# Altium PCB AVR精简学习板.PcbDoc (part 3 of 10)
Units mm, origin at the board's own origin, x right, y up, seen from the top; angles counter-clockwise.
Board outline 152.4 x 101.6 mm, 2 copper layers (Top Layer, Bottom Layer); 44 components, 51 nets, 211 pads, 6 vias.
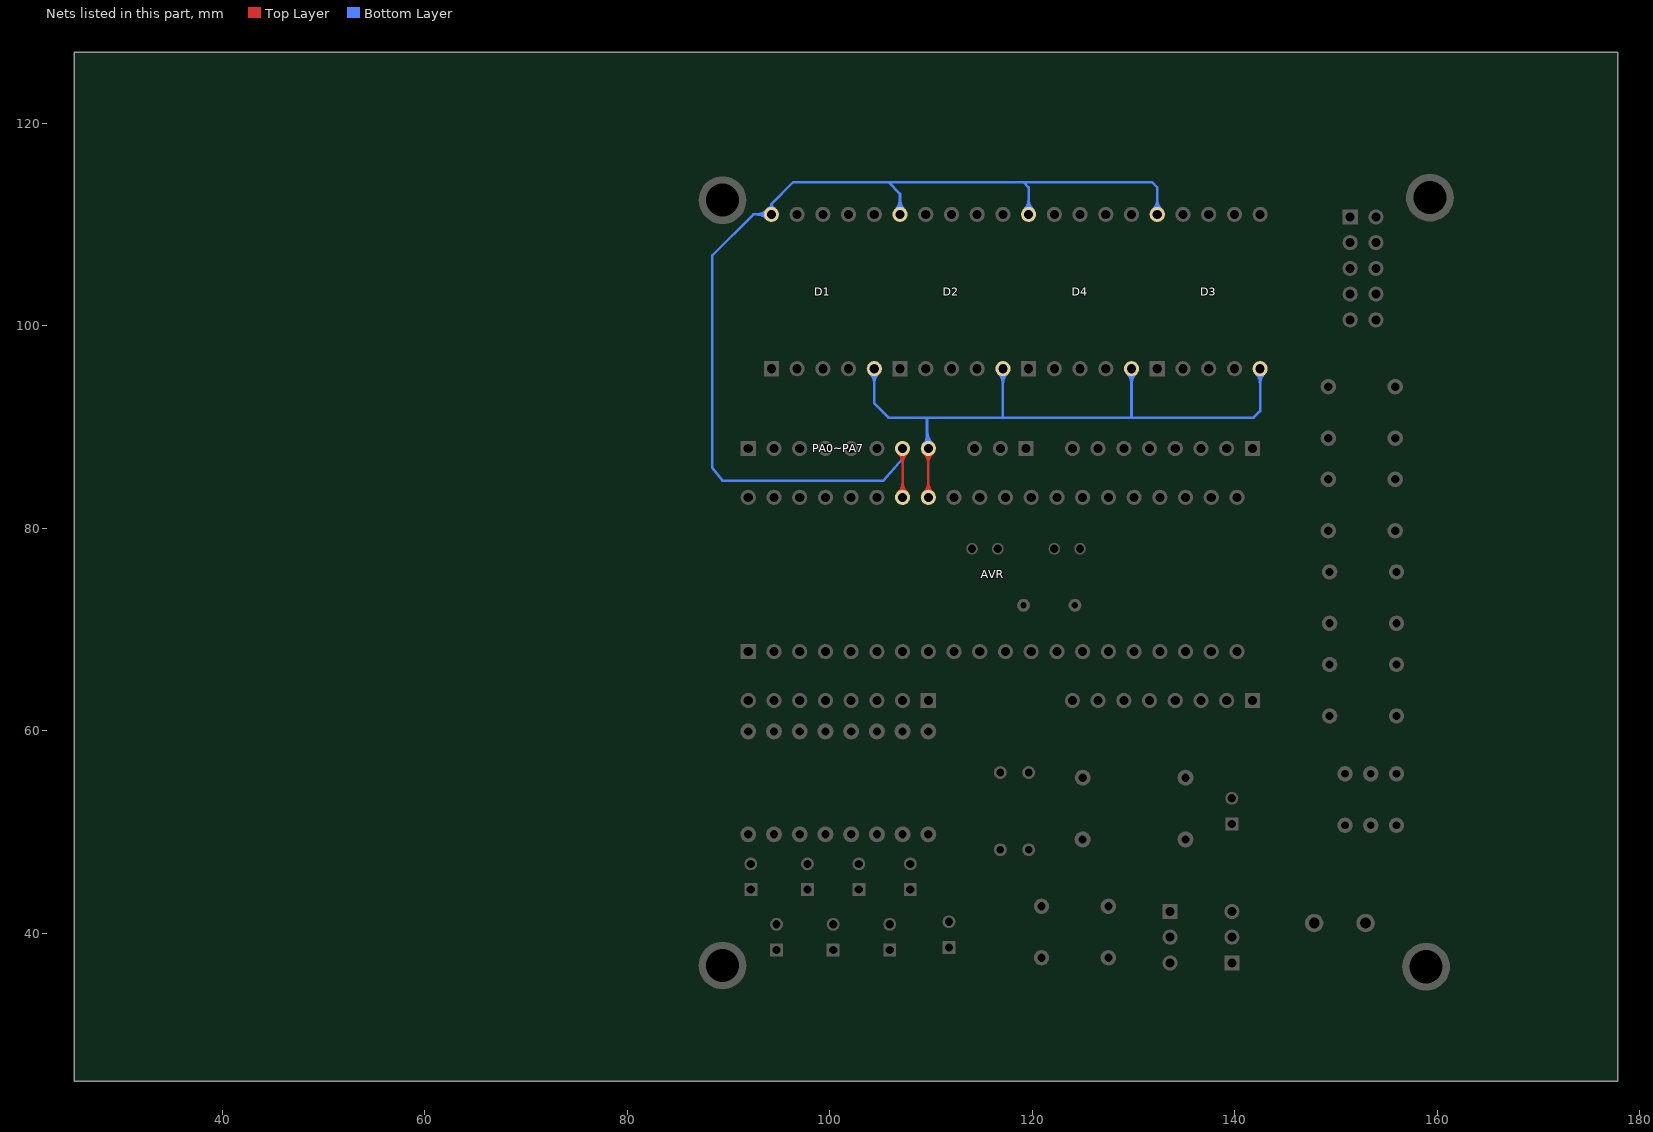
[diagram p3: the nets of this part, all layers, seen from the top]

## Via types
v1: diameter 1.27, hole 0.711, Top Layer to Bottom Layer, 6 vias

## Nets (pads, with @x,y where several pads share a name; then routed paths per layer and width w, separated by ;. In a path a pad name is that pad's centre, name@x,y a point inside that pad or via, vN(x,y) a via of type N, cw(c..) or ccw(c..) an arc to the next point about the centre after c; other vN are vias at no path point) (continued)
D6: AVR.34 D1.10 D2.10 D3.10 D4.10 PA0~PA7.7 | length 278.7
  Top Layer w0.254: D1.10@94.234,110.998 D1.10@94.234,111.125 ; AVR.34@107.188,83.058 PA0~PA7.7@107.188,87.884 ; AVR.34@106.747,83.499 ccw(c105.684,84.562) 107.188,84.562 ; AVR.34@106.747,83.499 ccw(c105.684,84.562) 107.188,84.562 ; AVR.34@106.747,83.499 ccw(c105.684,84.562) 107.188,84.562 ; AVR.34@106.747,83.499 ccw(c105.684,84.562) 107.188,84.562 ; AVR.34@106.747,83.499 ccw(c105.684,84.562) 107.188,84.562 ; AVR.34@106.747,83.499 ccw(c105.684,84.562) 107.188,84.562 ; AVR.34@106.747,83.499 ccw(c105.684,84.562) 107.188,84.562 ; PA0~PA7.7@106.747,87.443 cw(c105.684,86.38) 107.188,86.38 ; PA0~PA7.7@106.747,87.443 cw(c105.684,86.38) 107.188,86.38 ; PA0~PA7.7@106.747,87.443 cw(c105.684,86.38) 107.188,86.38 ; PA0~PA7.7@106.747,87.443 cw(c105.684,86.38) 107.188,86.38 ; PA0~PA7.7@106.747,87.443 cw(c105.684,86.38) 107.188,86.38 ; PA0~PA7.7@106.747,87.443 cw(c105.684,86.38) 107.188,86.38 ; PA0~PA7.7@106.747,87.443 cw(c105.684,86.38) 107.188,86.38 ; AVR.34@106.927,83.319 ccw(c106.297,83.949) 107.188,83.949 ; AVR.34@106.927,83.319 ccw(c106.297,83.949) 107.188,83.949 ; AVR.34@106.927,83.319 ccw(c106.297,83.949) 107.188,83.949 ; AVR.34@106.927,83.319 ccw(c106.297,83.949) 107.188,83.949 ; AVR.34@106.927,83.319 ccw(c106.297,83.949) 107.188,83.949 ; AVR.34@106.927,83.319 ccw(c106.297,83.949) 107.188,83.949 ; AVR.34@106.927,83.319 ccw(c106.297,83.949) 107.188,83.949 ; PA0~PA7.7@106.927,87.623 cw(c106.297,86.993) 107.188,86.993 ; PA0~PA7.7@106.927,87.623 cw(c106.297,86.993) 107.188,86.993 ; PA0~PA7.7@106.927,87.623 cw(c106.297,86.993) 107.188,86.993 ; PA0~PA7.7@106.927,87.623 cw(c106.297,86.993) 107.188,86.993 ; PA0~PA7.7@106.927,87.623 cw(c106.297,86.993) 107.188,86.993 ; PA0~PA7.7@106.927,87.623 cw(c106.297,86.993) 107.188,86.993 ; PA0~PA7.7@106.927,87.623 cw(c106.297,86.993) 107.188,86.993 ; 107.188,83.949 ccw(c108.079,83.949) AVR.34@107.449,83.319 ; 107.188,83.949 ccw(c108.079,83.949) AVR.34@107.449,83.319 ; 107.188,83.949 ccw(c108.079,83.949) AVR.34@107.449,83.319 ; 107.188,83.949 ccw(c108.079,83.949) AVR.34@107.449,83.319 ; 107.188,83.949 ccw(c108.079,83.949) AVR.34@107.449,83.319 ; 107.188,83.949 ccw(c108.079,83.949) AVR.34@107.449,83.319 ; 107.188,83.949 ccw(c108.079,83.949) AVR.34@107.449,83.319 ; 107.188,84.562 ccw(c108.692,84.562) AVR.34@107.629,83.499 ; 107.188,84.562 ccw(c108.692,84.562) AVR.34@107.629,83.499 ; 107.188,84.562 ccw(c108.692,84.562) AVR.34@107.629,83.499 ; 107.188,84.562 ccw(c108.692,84.562) AVR.34@107.629,83.499 ; 107.188,84.562 ccw(c108.692,84.562) AVR.34@107.629,83.499 ; 107.188,84.562 ccw(c108.692,84.562) AVR.34@107.629,83.499 ; 107.188,84.562 ccw(c108.692,84.562) AVR.34@107.629,83.499 ; 107.188,86.38 cw(c108.692,86.38) PA0~PA7.7@107.629,87.443 ; 107.188,86.38 cw(c108.692,86.38) PA0~PA7.7@107.629,87.443 ; 107.188,86.38 cw(c108.692,86.38) PA0~PA7.7@107.629,87.443 ; 107.188,86.38 cw(c108.692,86.38) PA0~PA7.7@107.629,87.443 ; 107.188,86.38 cw(c108.692,86.38) PA0~PA7.7@107.629,87.443 ; 107.188,86.38 cw(c108.692,86.38) PA0~PA7.7@107.629,87.443 ; 107.188,86.38 cw(c108.692,86.38) PA0~PA7.7@107.629,87.443 ; 107.188,86.993 cw(c108.079,86.993) PA0~PA7.7@107.449,87.623 ; 107.188,86.993 cw(c108.079,86.993) PA0~PA7.7@107.449,87.623 ; 107.188,86.993 cw(c108.079,86.993) PA0~PA7.7@107.449,87.623 ; 107.188,86.993 cw(c108.079,86.993) PA0~PA7.7@107.449,87.623 ; 107.188,86.993 cw(c108.079,86.993) PA0~PA7.7@107.449,87.623 ; 107.188,86.993 cw(c108.079,86.993) PA0~PA7.7@107.449,87.623 ; 107.188,86.993 cw(c108.079,86.993) PA0~PA7.7@107.449,87.623
  Bottom Layer w0.254: 105.791,114.173 106.934,113.03 D2.10@106.934,110.998 ; PA0~PA7.7@107.188,87.884 107.188,86.868 ; 119.126,114.173 119.634,113.665 D4.10@119.634,110.998 ; D3.10@132.334,110.998 132.334,113.665 131.826,114.173 96.393,114.173 94.234,112.014 ; 92.73,110.998 cw(c92.73,109.494) D1.10@93.793,110.557 ; 92.73,110.998 ccw(c92.73,112.502) D1.10@93.793,111.439 ; 92.73,110.998 cw(c92.73,109.494) D1.10@93.793,110.557 ; 92.73,110.998 ccw(c92.73,112.502) D1.10@93.793,111.439 ; 92.73,110.998 ccw(c92.73,112.502) D1.10@93.793,111.439 ; 92.73,110.998 cw(c92.73,109.494) D1.10@93.793,110.557 ; 92.73,110.998 ccw(c92.73,112.502) D1.10@93.793,111.439 ; 92.73,110.998 cw(c92.73,109.494) D1.10@93.793,110.557 ; 92.73,110.998 ccw(c92.73,112.502) D1.10@93.793,111.439 ; 92.73,110.998 cw(c92.73,109.494) D1.10@93.793,110.557 ; 92.73,110.998 ccw(c92.73,112.502) D1.10@93.793,111.439 ; 92.73,110.998 cw(c92.73,109.494) D1.10@93.793,110.557 ; 92.73,110.998 ccw(c92.73,112.502) D1.10@93.793,111.439 ; 92.73,110.998 cw(c92.73,109.494) D1.10@93.793,110.557 ; 93.343,110.998 cw(c93.343,110.107) D1.10@93.973,110.737 ; 93.343,110.998 ccw(c93.343,111.889) D1.10@93.973,111.259 ; 93.343,110.998 cw(c93.343,110.107) D1.10@93.973,110.737 ; 93.343,110.998 ccw(c93.343,111.889) D1.10@93.973,111.259 ; 93.343,110.998 ccw(c93.343,111.889) D1.10@93.973,111.259 ; 93.343,110.998 cw(c93.343,110.107) D1.10@93.973,110.737 ; 93.343,110.998 ccw(c93.343,111.889) D1.10@93.973,111.259 ; 93.343,110.998 cw(c93.343,110.107) D1.10@93.973,110.737 ; 93.343,110.998 ccw(c93.343,111.889) D1.10@93.973,111.259 ; 93.343,110.998 cw(c93.343,110.107) D1.10@93.973,110.737 ; 93.343,110.998 ccw(c93.343,111.889) D1.10@93.973,111.259 ; 93.343,110.998 cw(c93.343,110.107) D1.10@93.973,110.737 ; 93.343,110.998 ccw(c93.343,111.889) D1.10@93.973,111.259 ; 93.343,110.998 cw(c93.343,110.107) D1.10@93.973,110.737 ; D1.10@93.951,111.553 ccw(c93.717,112.014) 94.234,112.014 ; D1.10@93.951,111.553 ccw(c93.717,112.014) 94.234,112.014 ; D1.10@93.951,111.553 ccw(c93.717,112.014) 94.234,112.014 ; D1.10@93.951,111.553 ccw(c93.717,112.014) 94.234,112.014 ; D1.10@93.951,111.553 ccw(c93.717,112.014) 94.234,112.014 ; D1.10@93.951,111.553 ccw(c93.717,112.014) 94.234,112.014 ; D1.10@93.951,111.553 ccw(c93.717,112.014) 94.234,112.014 ; 94.234,112.014 ccw(c94.751,112.014) D1.10@94.517,111.553 ; 94.234,112.014 ccw(c94.751,112.014) D1.10@94.517,111.553 ; 94.234,112.014 ccw(c94.751,112.014) D1.10@94.517,111.553 ; 94.234,112.014 ccw(c94.751,112.014) D1.10@94.517,111.553 ; 94.234,112.014 ccw(c94.751,112.014) D1.10@94.517,111.553 ; 94.234,112.014 ccw(c94.751,112.014) D1.10@94.517,111.553 ; 94.234,112.014 ccw(c94.751,112.014) D1.10@94.517,111.553 ; 94.234,112.014 D1.10@94.234,110.998 92.456,110.998 88.392,106.934 88.392,85.979 89.408,84.709 105.283,84.709 107.188,86.868 ; D2.10@106.493,111.439 ccw(c105.43,112.502) 106.934,112.502 ; D2.10@106.493,111.439 ccw(c105.43,112.502) 106.934,112.502 ; D2.10@106.493,111.439 ccw(c105.43,112.502) 106.934,112.502 ; D2.10@106.493,111.439 ccw(c105.43,112.502) 106.934,112.502 ; D2.10@106.493,111.439 ccw(c105.43,112.502) 106.934,112.502 ; D2.10@106.493,111.439 ccw(c105.43,112.502) 106.934,112.502 ; D2.10@106.493,111.439 ccw(c105.43,112.502) 106.934,112.502 ; D2.10@106.673,111.259 ccw(c106.043,111.889) 106.934,111.889 ; D2.10@106.673,111.259 ccw(c106.043,111.889) 106.934,111.889 ; D2.10@106.673,111.259 ccw(c106.043,111.889) 106.934,111.889 ; D2.10@106.673,111.259 ccw(c106.043,111.889) 106.934,111.889 ; D2.10@106.673,111.259 ccw(c106.043,111.889) 106.934,111.889 ; D2.10@106.673,111.259 ccw(c106.043,111.889) 106.934,111.889 ; D2.10@106.673,111.259 ccw(c106.043,111.889) 106.934,111.889 ; PA0~PA7.7@106.905,87.329 cw(c106.671,86.868) 107.188,86.868 ; PA0~PA7.7@106.905,87.329 cw(c106.671,86.868) 107.188,86.868 ; PA0~PA7.7@106.905,87.329 cw(c106.671,86.868) 107.188,86.868 ; PA0~PA7.7@106.905,87.329 cw(c106.671,86.868) 107.188,86.868 ; PA0~PA7.7@106.905,87.329 cw(c106.671,86.868) 107.188,86.868 ; PA0~PA7.7@106.905,87.329 cw(c106.671,86.868) 107.188,86.868 ; PA0~PA7.7@106.905,87.329 cw(c106.671,86.868) 107.188,86.868 ; 106.934,111.889 ccw(c107.825,111.889) D2.10@107.195,111.259 ; 106.934,111.889 ccw(c107.825,111.889) D2.10@107.195,111.259 ; 106.934,111.889 ccw(c107.825,111.889) D2.10@107.195,111.259 ; 106.934,111.889 ccw(c107.825,111.889) D2.10@107.195,111.259 ; 106.934,111.889 ccw(c107.825,111.889) D2.10@107.195,111.259 ; 106.934,111.889 ccw(c107.825,111.889) D2.10@107.195,111.259 ; 106.934,111.889 ccw(c107.825,111.889) D2.10@107.195,111.259 ; 106.934,112.502 ccw(c108.438,112.502) D2.10@107.375,111.439 ; 106.934,112.502 ccw(c108.438,112.502) D2.10@107.375,111.439 ; 106.934,112.502 ccw(c108.438,112.502) D2.10@107.375,111.439 ; 106.934,112.502 ccw(c108.438,112.502) D2.10@107.375,111.439 ; 106.934,112.502 ccw(c108.438,112.502) D2.10@107.375,111.439 ; 106.934,112.502 ccw(c108.438,112.502) D2.10@107.375,111.439 ; 106.934,112.502 ccw(c108.438,112.502) D2.10@107.375,111.439 ; 107.188,86.868 cw(c107.705,86.868) PA0~PA7.7@107.471,87.329 ; 107.188,86.868 cw(c107.705,86.868) PA0~PA7.7@107.471,87.329 ; 107.188,86.868 cw(c107.705,86.868) PA0~PA7.7@107.471,87.329 ; 107.188,86.868 cw(c107.705,86.868) PA0~PA7.7@107.471,87.329 ; 107.188,86.868 cw(c107.705,86.868) PA0~PA7.7@107.471,87.329 ; 107.188,86.868 cw(c107.705,86.868) PA0~PA7.7@107.471,87.329 ; 107.188,86.868 cw(c107.705,86.868) PA0~PA7.7@107.471,87.329 ; D4.10@119.193,111.439 ccw(c118.13,112.502) 119.634,112.502 ; D4.10@119.193,111.439 ccw(c118.13,112.502) 119.634,112.502 ; D4.10@119.193,111.439 ccw(c118.13,112.502) 119.634,112.502 ; D4.10@119.193,111.439 ccw(c118.13,112.502) 119.634,112.502 ; D4.10@119.193,111.439 ccw(c118.13,112.502) 119.634,112.502 ; D4.10@119.193,111.439 ccw(c118.13,112.502) 119.634,112.502 ; D4.10@119.193,111.439 ccw(c118.13,112.502) 119.634,112.502 ; D4.10@119.373,111.259 ccw(c118.743,111.889) 119.634,111.889 ; D4.10@119.373,111.259 ccw(c118.743,111.889) 119.634,111.889 ; D4.10@119.373,111.259 ccw(c118.743,111.889) 119.634,111.889 ; D4.10@119.373,111.259 ccw(c118.743,111.889) 119.634,111.889 ; D4.10@119.373,111.259 ccw(c118.743,111.889) 119.634,111.889 ; D4.10@119.373,111.259 ccw(c118.743,111.889) 119.634,111.889 ; D4.10@119.373,111.259 ccw(c118.743,111.889) 119.634,111.889 ; 119.634,111.889 ccw(c120.525,111.889) D4.10@119.895,111.259 ; 119.634,111.889 ccw(c120.525,111.889) D4.10@119.895,111.259 ; 119.634,111.889 ccw(c120.525,111.889) D4.10@119.895,111.259 ; 119.634,111.889 ccw(c120.525,111.889) D4.10@119.895,111.259 ; 119.634,111.889 ccw(c120.525,111.889) D4.10@119.895,111.259 ; 119.634,111.889 ccw(c120.525,111.889) D4.10@119.895,111.259 ; 119.634,111.889 ccw(c120.525,111.889) D4.10@119.895,111.259 ; 119.634,112.502 ccw(c121.138,112.502) D4.10@120.075,111.439 ; 119.634,112.502 ccw(c121.138,112.502) D4.10@120.075,111.439 ; 119.634,112.502 ccw(c121.138,112.502) D4.10@120.075,111.439 ; 119.634,112.502 ccw(c121.138,112.502) D4.10@120.075,111.439 ; 119.634,112.502 ccw(c121.138,112.502) D4.10@120.075,111.439 ; 119.634,112.502 ccw(c121.138,112.502) D4.10@120.075,111.439 ; 119.634,112.502 ccw(c121.138,112.502) D4.10@120.075,111.439 ; D3.10@131.893,111.439 ccw(c130.83,112.502) 132.334,112.502 ; D3.10@131.893,111.439 ccw(c130.83,112.502) 132.334,112.502 ; D3.10@131.893,111.439 ccw(c130.83,112.502) 132.334,112.502 ; D3.10@131.893,111.439 ccw(c130.83,112.502) 132.334,112.502 ; D3.10@131.893,111.439 ccw(c130.83,112.502) 132.334,112.502 ; D3.10@131.893,111.439 ccw(c130.83,112.502) 132.334,112.502 ; D3.10@131.893,111.439 ccw(c130.83,112.502) 132.334,112.502 ; D3.10@132.073,111.259 ccw(c131.443,111.889) 132.334,111.889 ; D3.10@132.073,111.259 ccw(c131.443,111.889) 132.334,111.889 ; D3.10@132.073,111.259 ccw(c131.443,111.889) 132.334,111.889 ; D3.10@132.073,111.259 ccw(c131.443,111.889) 132.334,111.889 ; D3.10@132.073,111.259 ccw(c131.443,111.889) 132.334,111.889 ; D3.10@132.073,111.259 ccw(c131.443,111.889) 132.334,111.889 ; D3.10@132.073,111.259 ccw(c131.443,111.889) 132.334,111.889 ; 132.334,111.889 ccw(c133.225,111.889) D3.10@132.595,111.259 ; 132.334,111.889 ccw(c133.225,111.889) D3.10@132.595,111.259 ; 132.334,111.889 ccw(c133.225,111.889) D3.10@132.595,111.259 ; 132.334,111.889 ccw(c133.225,111.889) D3.10@132.595,111.259 ; 132.334,111.889 ccw(c133.225,111.889) D3.10@132.595,111.259 ; 132.334,111.889 ccw(c133.225,111.889) D3.10@132.595,111.259 ; 132.334,111.889 ccw(c133.225,111.889) D3.10@132.595,111.259 ; 132.334,112.502 ccw(c133.838,112.502) D3.10@132.775,111.439 ; 132.334,112.502 ccw(c133.838,112.502) D3.10@132.775,111.439 ; 132.334,112.502 ccw(c133.838,112.502) D3.10@132.775,111.439 ; 132.334,112.502 ccw(c133.838,112.502) D3.10@132.775,111.439 ; 132.334,112.502 ccw(c133.838,112.502) D3.10@132.775,111.439 ; 132.334,112.502 ccw(c133.838,112.502) D3.10@132.775,111.439 ; 132.334,112.502 ccw(c133.838,112.502) D3.10@132.775,111.439
D7: AVR.33 D1.5 D2.5 D3.5 D4.5 PA0~PA7.8 | length 246
  Top Layer w0.254: AVR.33@109.728,83.058 PA0~PA7.8@109.728,87.884 ; AVR.33@109.287,83.499 ccw(c108.224,84.562) 109.728,84.562 ; AVR.33@109.287,83.499 ccw(c108.224,84.562) 109.728,84.562 ; AVR.33@109.287,83.499 ccw(c108.224,84.562) 109.728,84.562 ; AVR.33@109.287,83.499 ccw(c108.224,84.562) 109.728,84.562 ; AVR.33@109.287,83.499 ccw(c108.224,84.562) 109.728,84.562 ; AVR.33@109.287,83.499 ccw(c108.224,84.562) 109.728,84.562 ; AVR.33@109.287,83.499 ccw(c108.224,84.562) 109.728,84.562 ; PA0~PA7.8@109.287,87.443 cw(c108.224,86.38) 109.728,86.38 ; PA0~PA7.8@109.287,87.443 cw(c108.224,86.38) 109.728,86.38 ; PA0~PA7.8@109.287,87.443 cw(c108.224,86.38) 109.728,86.38 ; PA0~PA7.8@109.287,87.443 cw(c108.224,86.38) 109.728,86.38 ; PA0~PA7.8@109.287,87.443 cw(c108.224,86.38) 109.728,86.38 ; PA0~PA7.8@109.287,87.443 cw(c108.224,86.38) 109.728,86.38 ; PA0~PA7.8@109.287,87.443 cw(c108.224,86.38) 109.728,86.38 ; AVR.33@109.467,83.319 ccw(c108.837,83.949) 109.728,83.949 ; AVR.33@109.467,83.319 ccw(c108.837,83.949) 109.728,83.949 ; AVR.33@109.467,83.319 ccw(c108.837,83.949) 109.728,83.949 ; AVR.33@109.467,83.319 ccw(c108.837,83.949) 109.728,83.949 ; AVR.33@109.467,83.319 ccw(c108.837,83.949) 109.728,83.949 ; AVR.33@109.467,83.319 ccw(c108.837,83.949) 109.728,83.949 ; AVR.33@109.467,83.319 ccw(c108.837,83.949) 109.728,83.949 ; PA0~PA7.8@109.467,87.623 cw(c108.837,86.993) 109.728,86.993 ; PA0~PA7.8@109.467,87.623 cw(c108.837,86.993) 109.728,86.993 ; PA0~PA7.8@109.467,87.623 cw(c108.837,86.993) 109.728,86.993 ; PA0~PA7.8@109.467,87.623 cw(c108.837,86.993) 109.728,86.993 ; PA0~PA7.8@109.467,87.623 cw(c108.837,86.993) 109.728,86.993 ; PA0~PA7.8@109.467,87.623 cw(c108.837,86.993) 109.728,86.993 ; PA0~PA7.8@109.467,87.623 cw(c108.837,86.993) 109.728,86.993 ; 109.728,83.949 ccw(c110.619,83.949) AVR.33@109.989,83.319 ; 109.728,83.949 ccw(c110.619,83.949) AVR.33@109.989,83.319 ; 109.728,83.949 ccw(c110.619,83.949) AVR.33@109.989,83.319 ; 109.728,83.949 ccw(c110.619,83.949) AVR.33@109.989,83.319 ; 109.728,83.949 ccw(c110.619,83.949) AVR.33@109.989,83.319 ; 109.728,83.949 ccw(c110.619,83.949) AVR.33@109.989,83.319 ; 109.728,83.949 ccw(c110.619,83.949) AVR.33@109.989,83.319 ; 109.728,84.562 ccw(c111.232,84.562) AVR.33@110.169,83.499 ; 109.728,84.562 ccw(c111.232,84.562) AVR.33@110.169,83.499 ; 109.728,84.562 ccw(c111.232,84.562) AVR.33@110.169,83.499 ; 109.728,84.562 ccw(c111.232,84.562) AVR.33@110.169,83.499 ; 109.728,84.562 ccw(c111.232,84.562) AVR.33@110.169,83.499 ; 109.728,84.562 ccw(c111.232,84.562) AVR.33@110.169,83.499 ; 109.728,84.562 ccw(c111.232,84.562) AVR.33@110.169,83.499 ; 109.728,86.38 cw(c111.232,86.38) PA0~PA7.8@110.169,87.443 ; 109.728,86.38 cw(c111.232,86.38) PA0~PA7.8@110.169,87.443 ; 109.728,86.38 cw(c111.232,86.38) PA0~PA7.8@110.169,87.443 ; 109.728,86.38 cw(c111.232,86.38) PA0~PA7.8@110.169,87.443 ; 109.728,86.38 cw(c111.232,86.38) PA0~PA7.8@110.169,87.443 ; 109.728,86.38 cw(c111.232,86.38) PA0~PA7.8@110.169,87.443 ; 109.728,86.38 cw(c111.232,86.38) PA0~PA7.8@110.169,87.443 ; 109.728,86.993 cw(c110.619,86.993) PA0~PA7.8@109.989,87.623 ; 109.728,86.993 cw(c110.619,86.993) PA0~PA7.8@109.989,87.623 ; 109.728,86.993 cw(c110.619,86.993) PA0~PA7.8@109.989,87.623 ; 109.728,86.993 cw(c110.619,86.993) PA0~PA7.8@109.989,87.623 ; 109.728,86.993 cw(c110.619,86.993) PA0~PA7.8@109.989,87.623 ; 109.728,86.993 cw(c110.619,86.993) PA0~PA7.8@109.989,87.623 ; 109.728,86.993 cw(c110.619,86.993) PA0~PA7.8@109.989,87.623
  Bottom Layer w0.254: D1.5@104.394,95.758 104.394,92.329 105.791,90.932 141.859,90.932 142.494,91.567 D3.5@142.494,95.758 ; 109.601,90.932 109.601,88.011 PA0~PA7.8@109.728,87.884 ; 116.967,90.932 117.094,91.059 D2.5@117.094,95.758 ; 129.794,90.932 D4.5@129.794,95.758 ; D1.5@103.953,95.317 cw(c102.89,94.254) 104.394,94.254 ; D1.5@103.953,95.317 cw(c102.89,94.254) 104.394,94.254 ; D1.5@103.953,95.317 cw(c102.89,94.254) 104.394,94.254 ; D1.5@103.953,95.317 cw(c102.89,94.254) 104.394,94.254 ; D1.5@103.953,95.317 cw(c102.89,94.254) 104.394,94.254 ; D1.5@103.953,95.317 cw(c102.89,94.254) 104.394,94.254 ; D1.5@103.953,95.317 cw(c102.89,94.254) 104.394,94.254 ; D1.5@104.133,95.497 cw(c103.503,94.867) 104.394,94.867 ; D1.5@104.133,95.497 cw(c103.503,94.867) 104.394,94.867 ; D1.5@104.133,95.497 cw(c103.503,94.867) 104.394,94.867 ; D1.5@104.133,95.497 cw(c103.503,94.867) 104.394,94.867 ; D1.5@104.133,95.497 cw(c103.503,94.867) 104.394,94.867 ; D1.5@104.133,95.497 cw(c103.503,94.867) 104.394,94.867 ; D1.5@104.133,95.497 cw(c103.503,94.867) 104.394,94.867 ; 104.394,94.254 cw(c105.898,94.254) D1.5@104.835,95.317 ; 104.394,94.254 cw(c105.898,94.254) D1.5@104.835,95.317 ; 104.394,94.254 cw(c105.898,94.254) D1.5@104.835,95.317 ; 104.394,94.254 cw(c105.898,94.254) D1.5@104.835,95.317 ; 104.394,94.254 cw(c105.898,94.254) D1.5@104.835,95.317 ; 104.394,94.254 cw(c105.898,94.254) D1.5@104.835,95.317 ; 104.394,94.254 cw(c105.898,94.254) D1.5@104.835,95.317 ; 104.394,94.867 cw(c105.285,94.867) D1.5@104.655,95.497 ; 104.394,94.867 cw(c105.285,94.867) D1.5@104.655,95.497 ; 104.394,94.867 cw(c105.285,94.867) D1.5@104.655,95.497 ; 104.394,94.867 cw(c105.285,94.867) D1.5@104.655,95.497 ; 104.394,94.867 cw(c105.285,94.867) D1.5@104.655,95.497 ; 104.394,94.867 cw(c105.285,94.867) D1.5@104.655,95.497 ; 104.394,94.867 cw(c105.285,94.867) D1.5@104.655,95.497 ; PA0~PA7.8@109.287,88.325 ccw(c108.531,89.081) 109.601,89.081 ; PA0~PA7.8@109.287,88.325 ccw(c108.531,89.081) 109.601,89.081 ; PA0~PA7.8@109.287,88.325 ccw(c108.531,89.081) 109.601,89.081 ; PA0~PA7.8@109.287,88.325 ccw(c108.531,89.081) 109.601,89.081 ; PA0~PA7.8@109.287,88.325 ccw(c108.531,89.081) 109.601,89.081 ; PA0~PA7.8@109.287,88.325 ccw(c108.531,89.081) 109.601,89.081 ; PA0~PA7.8@109.287,88.325 ccw(c108.531,89.081) 109.601,89.081 ; 109.601,89.081 ccw(c110.925,89.081) PA0~PA7.8@109.989,88.145 ; 109.601,89.081 ccw(c110.925,89.081) PA0~PA7.8@109.989,88.145 ; 109.601,89.081 ccw(c110.925,89.081) PA0~PA7.8@109.989,88.145 ; 109.601,89.081 ccw(c110.925,89.081) PA0~PA7.8@109.989,88.145 ; 109.601,89.081 ccw(c110.925,89.081) PA0~PA7.8@109.989,88.145 ; 109.601,89.081 ccw(c110.925,89.081) PA0~PA7.8@109.989,88.145 ; 109.601,89.081 ccw(c110.925,89.081) PA0~PA7.8@109.989,88.145 ; 109.601,89.695 ccw(c111.539,89.695) PA0~PA7.8@110.169,88.325 ; 109.601,89.695 ccw(c111.539,89.695) PA0~PA7.8@110.169,88.325 ; 109.601,89.695 ccw(c111.539,89.695) PA0~PA7.8@110.169,88.325 ; 109.601,89.695 ccw(c111.539,89.695) PA0~PA7.8@110.169,88.325 ; 109.601,89.695 ccw(c111.539,89.695) PA0~PA7.8@110.169,88.325 ; 109.601,89.695 ccw(c111.539,89.695) PA0~PA7.8@110.169,88.325 ; 109.601,89.695 ccw(c111.539,89.695) PA0~PA7.8@110.169,88.325 ; D2.5@116.653,95.317 cw(c115.59,94.254) 117.094,94.254 ; D2.5@116.653,95.317 cw(c115.59,94.254) 117.094,94.254 ; D2.5@116.653,95.317 cw(c115.59,94.254) 117.094,94.254 ; D2.5@116.653,95.317 cw(c115.59,94.254) 117.094,94.254 ; D2.5@116.653,95.317 cw(c115.59,94.254) 117.094,94.254 ; D2.5@116.653,95.317 cw(c115.59,94.254) 117.094,94.254 ; D2.5@116.653,95.317 cw(c115.59,94.254) 117.094,94.254 ; D2.5@116.833,95.497 cw(c116.203,94.867) 117.094,94.867 ; D2.5@116.833,95.497 cw(c116.203,94.867) 117.094,94.867 ; D2.5@116.833,95.497 cw(c116.203,94.867) 117.094,94.867 ; D2.5@116.833,95.497 cw(c116.203,94.867) 117.094,94.867 ; D2.5@116.833,95.497 cw(c116.203,94.867) 117.094,94.867 ; D2.5@116.833,95.497 cw(c116.203,94.867) 117.094,94.867 ; D2.5@116.833,95.497 cw(c116.203,94.867) 117.094,94.867 ; 117.094,94.254 cw(c118.598,94.254) D2.5@117.535,95.317 ; 117.094,94.254 cw(c118.598,94.254) D2.5@117.535,95.317 ; 117.094,94.254 cw(c118.598,94.254) D2.5@117.535,95.317 ; 117.094,94.254 cw(c118.598,94.254) D2.5@117.535,95.317 ; 117.094,94.254 cw(c118.598,94.254) D2.5@117.535,95.317 ; 117.094,94.254 cw(c118.598,94.254) D2.5@117.535,95.317 ; 117.094,94.254 cw(c118.598,94.254) D2.5@117.535,95.317 ; 117.094,94.867 cw(c117.985,94.867) D2.5@117.355,95.497 ; 117.094,94.867 cw(c117.985,94.867) D2.5@117.355,95.497 ; 117.094,94.867 cw(c117.985,94.867) D2.5@117.355,95.497 ; 117.094,94.867 cw(c117.985,94.867) D2.5@117.355,95.497 ; 117.094,94.867 cw(c117.985,94.867) D2.5@117.355,95.497 ; 117.094,94.867 cw(c117.985,94.867) D2.5@117.355,95.497 ; 117.094,94.867 cw(c117.985,94.867) D2.5@117.355,95.497 ; D4.5@129.353,95.317 cw(c128.29,94.254) 129.794,94.254 ; D4.5@129.353,95.317 cw(c128.29,94.254) 129.794,94.254 ; D4.5@129.353,95.317 cw(c128.29,94.254) 129.794,94.254 ; D4.5@129.353,95.317 cw(c128.29,94.254) 129.794,94.254 ; D4.5@129.353,95.317 cw(c128.29,94.254) 129.794,94.254 ; D4.5@129.353,95.317 cw(c128.29,94.254) 129.794,94.254 ; D4.5@129.353,95.317 cw(c128.29,94.254) 129.794,94.254 ; D4.5@129.533,95.497 cw(c128.903,94.867) 129.794,94.867 ; D4.5@129.533,95.497 cw(c128.903,94.867) 129.794,94.867 ; D4.5@129.533,95.497 cw(c128.903,94.867) 129.794,94.867 ; D4.5@129.533,95.497 cw(c128.903,94.867) 129.794,94.867 ; D4.5@129.533,95.497 cw(c128.903,94.867) 129.794,94.867 ; D4.5@129.533,95.497 cw(c128.903,94.867) 129.794,94.867 ; D4.5@129.533,95.497 cw(c128.903,94.867) 129.794,94.867 ; 129.794,94.254 cw(c131.298,94.254) D4.5@130.235,95.317 ; 129.794,94.254 cw(c131.298,94.254) D4.5@130.235,95.317 ; 129.794,94.254 cw(c131.298,94.254) D4.5@130.235,95.317 ; 129.794,94.254 cw(c131.298,94.254) D4.5@130.235,95.317 ; 129.794,94.254 cw(c131.298,94.254) D4.5@130.235,95.317 ; 129.794,94.254 cw(c131.298,94.254) D4.5@130.235,95.317 ; 129.794,94.254 cw(c131.298,94.254) D4.5@130.235,95.317 ; 129.794,94.867 cw(c130.685,94.867) D4.5@130.055,95.497 ; 129.794,94.867 cw(c130.685,94.867) D4.5@130.055,95.497 ; 129.794,94.867 cw(c130.685,94.867) D4.5@130.055,95.497 ; 129.794,94.867 cw(c130.685,94.867) D4.5@130.055,95.497 ; 129.794,94.867 cw(c130.685,94.867) D4.5@130.055,95.497 ; 129.794,94.867 cw(c130.685,94.867) D4.5@130.055,95.497 ; 129.794,94.867 cw(c130.685,94.867) D4.5@130.055,95.497 ; D3.5@142.053,95.317 cw(c140.99,94.254) 142.494,94.254 ; D3.5@142.053,95.317 cw(c140.99,94.254) 142.494,94.254 ; D3.5@142.053,95.317 cw(c140.99,94.254) 142.494,94.254 ; D3.5@142.053,95.317 cw(c140.99,94.254) 142.494,94.254 ; D3.5@142.053,95.317 cw(c140.99,94.254) 142.494,94.254 ; D3.5@142.053,95.317 cw(c140.99,94.254) 142.494,94.254 ; D3.5@142.053,95.317 cw(c140.99,94.254) 142.494,94.254 ; D3.5@142.233,95.497 cw(c141.603,94.867) 142.494,94.867 ; D3.5@142.233,95.497 cw(c141.603,94.867) 142.494,94.867 ; D3.5@142.233,95.497 cw(c141.603,94.867) 142.494,94.867 ; D3.5@142.233,95.497 cw(c141.603,94.867) 142.494,94.867 ; D3.5@142.233,95.497 cw(c141.603,94.867) 142.494,94.867 ; D3.5@142.233,95.497 cw(c141.603,94.867) 142.494,94.867 ; D3.5@142.233,95.497 cw(c141.603,94.867) 142.494,94.867 ; 142.494,94.254 cw(c143.998,94.254) D3.5@142.935,95.317 ; 142.494,94.254 cw(c143.998,94.254) D3.5@142.935,95.317 ; 142.494,94.254 cw(c143.998,94.254) D3.5@142.935,95.317 ; 142.494,94.254 cw(c143.998,94.254) D3.5@142.935,95.317 ; 142.494,94.254 cw(c143.998,94.254) D3.5@142.935,95.317 ; 142.494,94.254 cw(c143.998,94.254) D3.5@142.935,95.317 ; 142.494,94.254 cw(c143.998,94.254) D3.5@142.935,95.317 ; 142.494,94.867 cw(c143.385,94.867) D3.5@142.755,95.497 ; 142.494,94.867 cw(c143.385,94.867) D3.5@142.755,95.497 ; 142.494,94.867 cw(c143.385,94.867) D3.5@142.755,95.497 ; 142.494,94.867 cw(c143.385,94.867) D3.5@142.755,95.497 ; 142.494,94.867 cw(c143.385,94.867) D3.5@142.755,95.497 ; 142.494,94.867 cw(c143.385,94.867) D3.5@142.755,95.497 ; 142.494,94.867 cw(c143.385,94.867) D3.5@142.755,95.497